# Altium PCB shower.PcbDoc
Units mil, origin at the board's own origin, x right, y up, seen from the top; angles counter-clockwise.
Board outline 1185 x 2235 mil, 2 copper layers (Top Layer, Bottom Layer); 123 components, 63 nets, 249 pads, 31 vias.
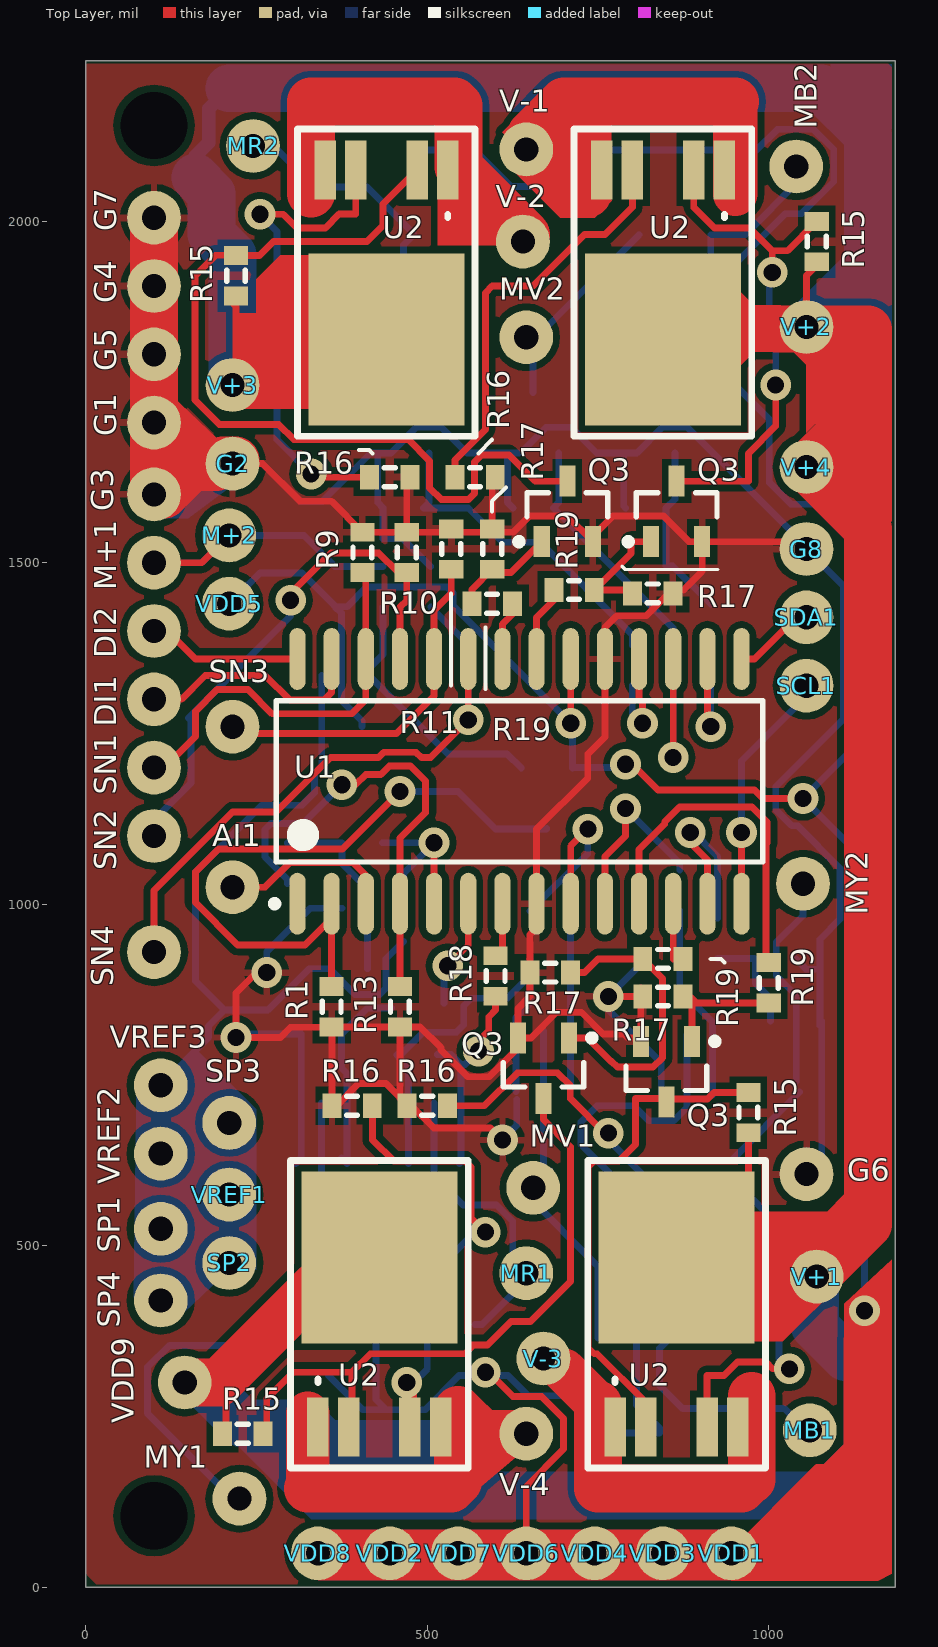
[diagram p0: Top Layer view]
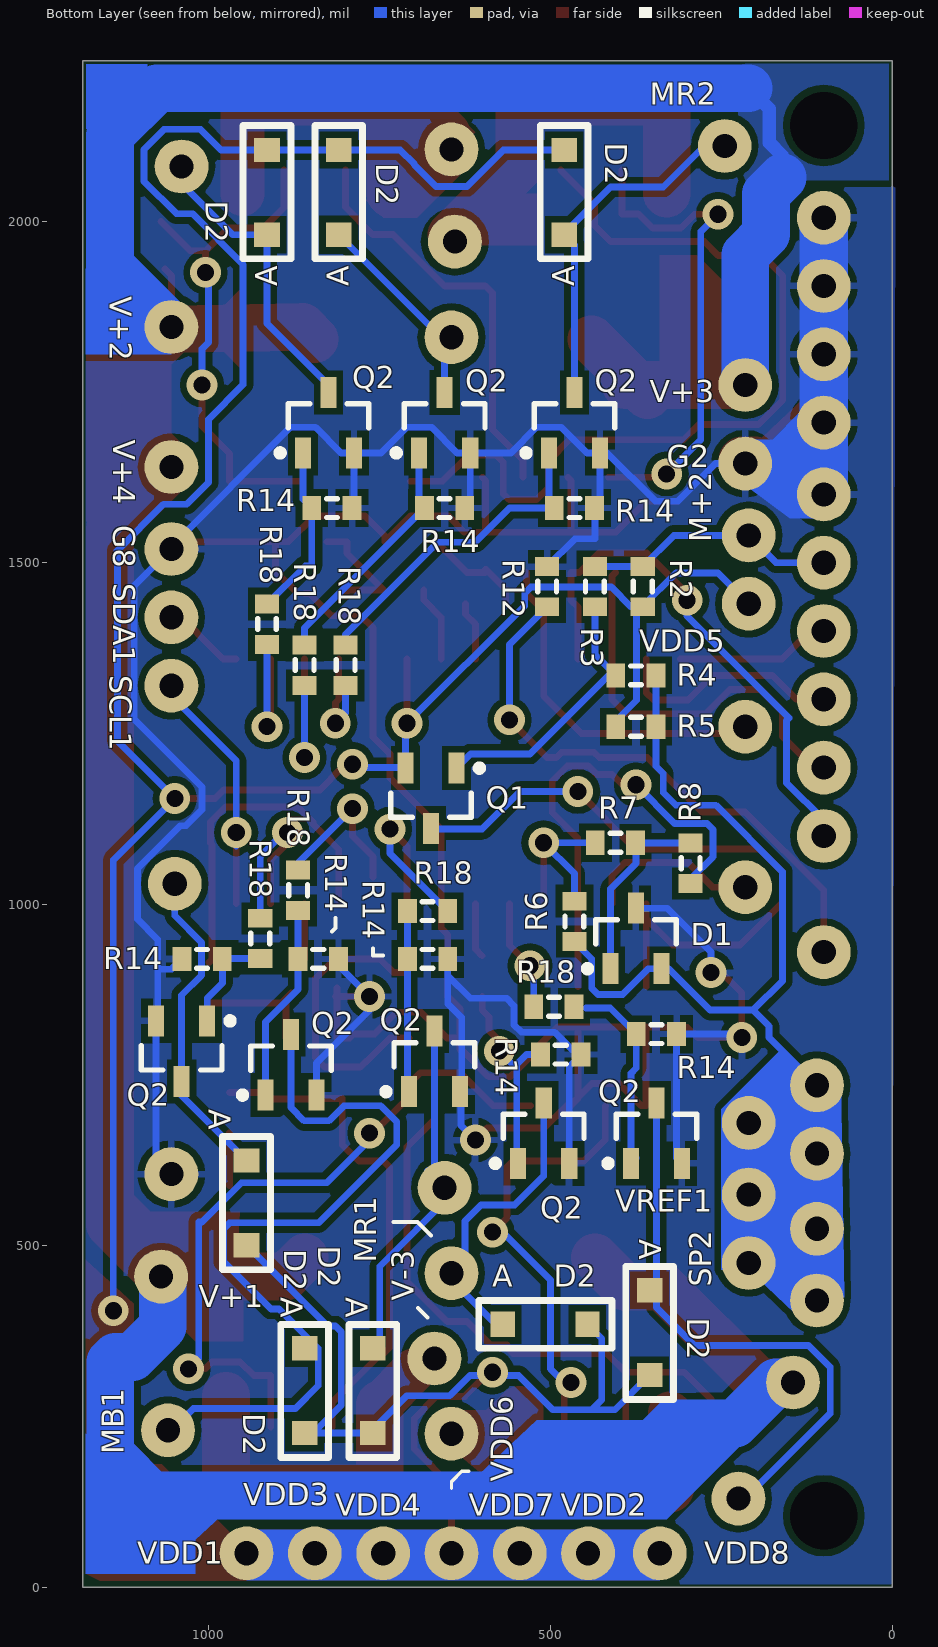
[diagram p1: Bottom Layer view, seen from below]

## Layer stack, top to bottom
Top Layer: signal copper 1.4
Dielectric: dielectric 12.6, FR-4, Dk 4.8
Bottom Layer: signal copper 1.4

## Board outline
0,0 0,2235 1185,2235 1185,0

## Design rules (kind name [scope] priority, off if disabled: settings)
Clearance [All] p1: gap=10
MinimumSolderMaskSliver [All] p1: minsoldermaskwidth=9.5
PolygonConnect [All] p1: connectstyle=Relief reliefconductorwidth=10 reliefentries=4 polygonreliefangle="90 Angle" airgapwidth=10
RoutingVias [All] p1: holewidth=28 width=50 viastyle="Through Hole" minholewidth=28 minwidth=45 maxholewidth=28 maxwidth=55
SMDNeckDown SMDNeckDownMC [InNetClass('mc')] p1: percent=250.000
SMDNeckDown SMDNeckDownHC [InNetClass('hc')] p2: percent=250.000
SilkToSilkClearance [All] p1: silktosilkclearance=6.5
SilkToSolderMaskClearance SilkToSolderMaskClearance_R0603 [HasFootprint('J1-0603')] p1: minsilkscreentomaskgap=0 clearancetoexposedcopper=TRUE
SilkToSolderMaskClearance [IsPad] p2: minsilkscreentomaskgap=10 clearancetoexposedcopper=TRUE
SolderMaskExpansion [All] p1: expansion=4
Width WidthHC [InNetClass('hc')] p1: maxlimit=10000 minlimit=10 preferedwidth=70
Width [All] p2: maxlimit=1000 minlimit=10 preferedwidth=10
Width WidthMc [InNetClass('mc')] p3: maxlimit=500 minlimit=10 preferedwidth=30
25 further rules are at their usual default settings.

## Classes and differential pairs
channel class vdriver: U9 U10 U11 U12
channel class mdriver: U1 U2 U3 U4 U5 U6 U7 U8
net class mc: NetD2_U1_1 NetD2_U2_1 NetD2_U3_1 NetD2_U4_1 NetD2_U5_1 NetD2_U6_1 NetD2_U7_1 NetD2_U8_1 VCC VOVER
net class hc: NetR15_U9_1 NetU2_U9_1 NetU2_U10_1 NetU2_U11_1 NetU2_U12_1
component class U12: Q3 R15 R16 R17 R19 U2
component class U11: Q3 R15 R16 R17 R19 U2
component class U10: Q3 R15 R16 R17 R19 U2
component class U9: Q3 R15 R16 R17 R19 U2
component class U8: D2 Q2 R14 R18
component class U7: D2 Q2 R14 R18
component class U6: D2 Q2 R14 R18
component class U5: D2 Q2 R14 R18
component class U4: D2 Q2 R14 R18
component class U3: D2 Q2 R14 R18
component class U2: D2 Q2 R14 R18
component class U1: D2 Q2 R14 R18
component class shower: AI1 D1 DI1 DI2 G1 G2 G3 G4 G5 G6 G7 G8 M+1 M+2 MB1 MB2 MR1 MR2 MV1 MV2 MY1 MY2 Q1 R1 R2 R3 R4 R5 R6 R7 R8 R9 R10 R11 R12 R13 SCL1 SDA1 SN1 SN2 SN3 SN4 SP1 SP2 SP3 SP4 V+1 V+2 V+3 V+4 V-1 V-2 V-3 V-4 VDD1 VDD2 VDD3 VDD4 VDD5 VDD6 VDD7 VDD8 VDD9 VREF1 VREF2 VREF3

## Components (designator, comment, footprint, x,y, rotation, side; value= is the part's Value field where it differs from the comment)
AI1 "+5V" PIN1 215,1025 r0 top
D1 "TLV431B" SOT-23_N 375,950 r90 bottom
D2 "1N4148W" SOD-123 915,1980 r90 bottom
D2 "1N4148W" SOD-123 810,1980 r90 bottom
D2 "1N4148W" SOD-123 480,1980 r90 bottom
D2 "1N4148W" SOD-123 945,625 r270 bottom
D2 "1N4148W" SOD-123 860,350 r270 bottom
D2 "1N4148W" SOD-123 760,350 r270 bottom
D2 "1N4148W" SOD-123 570,385 r180 bottom
D2 "1N4148W" SOD-123 355,435 r270 bottom
DI1 "+5V" PIN1 100,1300 r0 top
DI2 "+5V" PIN1 100,1400 r0 top
G1 "Socket" PIN1 100,1705 r0 top
G2 "Socket" PIN1 215,1645 r0 top
G3 "Socket" PIN1 100,1600 r0 top
G4 "Socket" PIN1 100,1905 r0 top
G5 "Socket" PIN1 100,1805 r0 top
G6 "Socket" PIN1 1055,605 r0 top
G7 "Socket" PIN1 100,2005 r0 top
G8 "Socket" PIN1 1055,1520 r0 top
M+1 "+5V" PIN1 100,1500 r0 top
M+2 "+5V" PIN1 210,1540 r0 top
MB1 "B" PIN1 1060,230 r0 top
MB2 "B" PIN1 1040,2080 r0 top
MR1 "R" PIN1 645,460 r0 top
MR2 "R" PIN1 245,2110 r0 top
MV1 "V" PIN1 655,585 r0 top
MV2 "V" PIN1 645,1830 r0 top
MY1 "Y" PIN1 225,130 r0 top
MY2 "Y" PIN1 1050,1030 r0 top
Q1 "BC857B" SOT-23_N 675,1155 r270 bottom
Q2 "BC847B" SOT-23_N 825,1705 r90 bottom
Q2 "BC847B" SOT-23_N 655,1705 r90 bottom
Q2 "BC847B" SOT-23_N 465,1705 r90 bottom
Q2 "BC847B" SOT-23_N 1040,785 r270 bottom
Q2 "BC847B" SOT-23_N 880,765 r90 bottom
Q2 "BC847B" SOT-23_N 670,770 r90 bottom
Q2 "BC847B" SOT-23_N 510,665 r90 bottom
Q2 "BC847B" SOT-23_N 345,665 r90 bottom
Q3 "BC847B" SOT-23_N 670,760 r270 top
Q3 "BC847B" SOT-23_N 850,755 r270 top
Q3 "BC847B" SOT-23_N 705,1575 r90 top
Q3 "BC847B" SOT-23_N 865,1575 r90 top
R1 "10k" J1-0603 360,850 r90 top
R2 "1R" J1-0603 365,1465 r270 bottom
R3 "3.3k" J1-0603 435,1465 r90 bottom
R4 "16.7k 0.1%" J1-0603 375,1335 r0 bottom
R5 "1k 0.1%" J1-0603 375,1260 r0 bottom
R6 "2.87k 0.1%" J1-0603 465,975 r270 bottom
R7 "1.8k 0.1%" J1-0603 405,1090 r0 bottom
R8 "698 0.1%" J1-0603 295,1060 r90 bottom
R9 "10k" J1-0603 405,1515 r270 top
R10 "10k" J1-0603 470,1515 r270 top
R11 "10k" J1-0603 535,1520 r270 top
R12 "10k" J1-0603 505,1465 r270 bottom
R13 "4.02k 0.1%" J1-0603 460,850 r90 top
R14 "10k" J1-0603 820,1580 r180 bottom
R14 "10k" J1-0603 655,1580 r180 bottom
R14 "10k" J1-0603 465,1580 r180 bottom
R14 "10k" J1-0603 1010,920 r0 bottom
R14 "10k" J1-0603 840,920 r180 bottom
R14 "10k" J1-0603 680,920 r180 bottom
R14 "10k" J1-0603 485,780 r180 bottom
R14 "10k" J1-0603 345,810 r180 bottom
R15 "22k" J1-0603 230,225 r0 top
R15 "22k" J1-0603 970,695 r90 top
R15 "22k" J1-0603 220,1920 r90 top
R15 "22k" J1-0603 1070,1970 r90 top
R16 "1.2k" J1-0603 390,705 r180 top
R16 "1.2k" J1-0603 500,705 r180 top
R16 "1.2k" J1-0603 445,1625 r0 top
R16 "1.2k" J1-0603 570,1625 r0 top
R17 "10k" J1-0603 680,900 r180 top
R17 "10k" J1-0603 845,865 r180 top
R17 "10k" J1-0603 595,1520 r90 top
R17 "10k" J1-0603 830,1455 r0 top
R18 "1.2k" J1-0603 915,1410 r90 bottom
R18 "1.2k" J1-0603 860,1350 r90 bottom
R18 "1.2k" J1-0603 800,1350 r90 bottom
R18 "1.2k" J1-0603 925,950 r270 bottom
R18 "1.2k" J1-0603 869.53,1020.47 r270 bottom
R18 "1.2k" J1-0603 680,990 r0 bottom
R18 "1.2k" J1-0603 600,895 r270 top
R18 "1.2k" J1-0603 495,850 r180 bottom
R19 "1.2k" J1-0603 845,920 r180 top
R19 "1.2k" J1-0603 1000,885 r270 top
R19 "1.2k" J1-0603 595,1440 r180 top
R19 "1.2k" J1-0603 715,1460 r0 top
SCL1 "+5V" PIN1 1055,1320 r90 top
SDA1 "+5V" PIN1 1055,1420 r90 top
SN1 "+5V" PIN1 100,1200 r0 top
SN2 "+5V" PIN1 100,1100 r0 top
SN3 "+5V" PIN1 215,1260 r0 top
SN4 "+5V" PIN1 100,930 r0 top
SP1 "+5V" PIN1 110,525 r0 top
SP2 "+5V" PIN1 210,475 r0 top
SP3 "+5V" PIN1 210,680 r0 top
SP4 "+5V" PIN1 110,420 r0 top
U1 "PIC16F1938/SO" SOIC-SO28_N 635,1180 r90 top
U2 "BTS6143D" BTS6143D 340,235 r0 top
U2 "BTS6143D" BTS6143D 775,235 r0 top
U2 "BTS6143D" BTS6143D 530,2075 r180 top
U2 "BTS6143D" BTS6143D 935,2075 r180 top
V+1 "+5V" PIN1 1070,455 r0 top
V+2 "+5V" PIN1 1055,1845 r0 top
V+3 "+5V" PIN1 215,1760 r0 top
V+4 "+5V" PIN1 1055,1640 r0 top
V-1 "+5V" PIN1 645,2105 r0 top
V-2 "+5V" PIN1 640,1970 r0 top
V-3 "+5V" PIN1 670,335 r0 top
V-4 "+5V" PIN1 645,225 r0 top
VDD1 "+5V" PIN1 945,50 r90 top
VDD2 "+5V" PIN1 445,50 r90 top
VDD3 "+5V" PIN1 845,50 r90 top
VDD4 "+5V" PIN1 745,50 r90 top
VDD5 "+5V" PIN1 210,1440 r90 top
VDD6 "+5V" PIN1 645,50 r90 top
VDD7 "+5V" PIN1 545,50 r90 top
VDD8 "+5V" PIN1 340,50 r90 top
VDD9 "+5V" PIN1 145,300 r90 top
VREF1 "+5V" PIN1 210,575 r90 top
VREF2 "+5V" PIN1 110,635 r90 top
VREF3 "+5V" PIN1 110,735 r90 top

## Footprints (in the part's own frame and the unit in brackets; to place one, negate y for a bottom-side part, rotate by r counter-clockwise, add the part's x,y. Pads: shape width x height; smd on the part's side, far side on the other; paste and mask are expansions set on the pad)
BTS6143D [mm]
  rect 0.8x2.2 smd mask+0.03: 1(0,0) 2(1.14,0) 4(3.42,0) 5(4.56,0)
  rect 5.8x6.4 smd: 3(2.28,6.3)
  silkscreen extent -1.02,-1.52 5.59,9.91
J1-0603 [mm] "Chip Resistor, Body 1.6x0.8mm, IPC High Density"
  rect 0.7x0.9 smd: 1(-0.75,0) 2(0.75,0)
  silkscreen extent -0.2,-0.35 0.2,0.35, body extent -0.85,-0.48 0.85,0.48, height 0.9
PIN1 [mm] "Connector; Plug"
  round 2 hole 0.9: 1(0,0)
SOD-123 [mm]
  rect 0.9x0.95 smd: 1(0,0) 2(3.15,0)
  silkscreen extent -0.89,-0.89 4.06,0.89
SOIC-SO28_N [mm] "SOIC, 28-Leads, Body 17.9x7.5mm, Pitch 1.27mm, IPC Medium Density"
  oval 2.3x0.6 smd: 1(-4.55,8.255) 2(-4.55,6.985) 3(-4.55,5.715) 4(-4.55,4.445) 5(-4.55,3.175) 6(-4.55,1.905) 7(-4.55,0.635) 8(-4.55,-0.635) 9(-4.55,-1.905) 10(-4.55,-3.175) 11(-4.55,-4.445) 12(-4.55,-5.715) 13(-4.55,-6.985) 14(-4.55,-8.255) 15(4.55,-8.255) 16(4.55,-6.985) 17(4.55,-5.715) 18(4.55,-4.445) 19(4.55,-3.175) 20(4.55,-1.905) 21(4.55,-0.635) 22(4.55,0.635) 23(4.55,1.905) 24(4.55,3.175) 25(4.55,4.445) 26(4.55,5.715) 27(4.55,6.985) 28(4.55,8.255)
  silkscreen extent -4.67,-9.05 3,9.23, body extent -3.8,-9.06 3.8,9.06, height 2.65
SOT-23_N [mm] "SOT23, 3-Leads, Body 2.9x1.3mm, Pitch 0.95mm, Lead Span 2.5mm, IPC Medium Density"
  rect 1.15x0.6 smd: 1(-1.125,0.95) 2(-1.125,-0.95) 3(1.125,0)
  silkscreen extent -1.25,-1.5 0.7,1.93, body extent -0.7,-1.5 0.7,1.5, height 1.1

## Part data
AI1 DI1 DI2 M+1 M+2 MB1 MB2 MR1 MR2 MV1 MV2 MY1 MY2 SCL1 SDA1 SN1 SN2 SN3 SN4 SP1 SP2 SP3 SP4 V+1 V+2 V+3 V+4 V-1 V-2 V-3 V-4 VDD1 VDD2 VDD3 VDD4 VDD5 VDD6 VDD7 VDD8 VDD9 VREF1 VREF2 VREF3: library part Socket, "Socket"
D1: library part TLV431A
D2 D2 D2 D2 D2 D2 D2 D2: library part Diode, "Default Diode"
Q1: library part PNP, "PNP Bipolar Transistor"
Q2 Q2 Q2 Q2 Q2 Q2 Q2 Q2 Q3 Q3 Q3 Q3: library part NPN, "NPN Bipolar Transistor"
R1 R2 R3 R4 R5 R6 R7 R8 R9 R10 R11 R12 R13 R14 R14 R14 R14 R14 R14 R14 R14 R15 R15 R15 R15 R16 R16 R16 R16 R17 R17 R17 R17 R18 R18 R18 R18 R18 R18 R18 R18 R19 R19 R19 R19: library part Res3, "Resistor"
U1: library part PIC16F1936T-I/SO, "CMOS Microcontroller with LCD Driver, 8K (words) Program Memory, 256 Bytes Data Memory, 512 Bytes SRAM, 25 I/O's, 28-Pin SOIC, Industrial Temperature, Tape and Reel"

## Free pads (board coordinates)
  round 0 hole 98.43: ""(100,105) ""(100,2140)

## Via types
v1: diameter 45, hole 25, Top Layer to Bottom Layer, 31 vias

## Nets (pads, with @x,y where several pads share a name; then routed paths per layer and width w, separated by ;. In a path a pad name is that pad's centre, name@x,y a point inside that pad or via, vN(x,y) a via of type N, cw(c..) or ccw(c..) an arc to the next point about the centre after c; other vN are vias at no path point)
GND: D1.3 G1.1 G2.1 G3.1 G4.1 G5.1 G6.1 G7.1 G8.1 Q2.2 Q3.2 R1.1 R9.1 R10.1 R11.1 R12.1 R13.1 R14.2 R16.2 R17.2 U1.8 U1.19 | length 8433.9
  Top Layer w10: G2.1 258.43,1645 313.43,1590 359.53,1590 R9.1 R10.1 ; v1@265,910 v1(265,900) 250,900 220,870 v1(220,805) 285,805 300,820 R1.1@360.47,820 ; R16.2@360,705 R16.2@360.47,705 ; R16.2@474.53,1625 470,1620.47 R10.1 ; R16.2@599.53,1625 595,1620.47 R17.2@595,1544.53 ; v1(610,655) 592.72,672.28 509.53,672.28 476.82,705 R16.2@470.47,705 ; v1@765,860 v1(765,865) R17.2@815,865 ; R17.2@812.6,877.87 812.6,804.29 793.99,804.29 788.28,810 757.35,810 725.43,841.93 689.38,841.93 651.74,804.29 Q3.2@632.6,804.29 ; R17.2@859.53,1455 853.18,1455 820.47,1422.28 777.28,1422.28 760,1405 U1.19 760,1245 735,1220 735,1185 660,1110 U1.8 660,965 650.47,955.47 650.47,900 650.47,865.47 632.6,847.6 Q3.2@632.6,804.29 ; 875,1460 902.4,1487.4 Q3.2@902.4,1530.71 ; G8.1 1044.29,1530.71 Q3.2@902.4,1530.71 ; R16.2@360.47,705 366.82,705 399.53,737.72 439.52,737.72 R16.2@460,717.24 ; R16.2@360.47,705 R1.1@360.47,820 ; R1.1@360.47,820 R1.1 R13.1 ; R16.2@460,717.24 470.47,706.76 R16.2@470.47,705 ; R16.2@460,717.24 460,715.47 R16.2@470.47,705 ; R16.2@460,717.24 R13.1 ; R13.1 489.53,820.47 520,790 520,786.97 559.47,747.5 590.53,747.5 630.63,787.6 632.6,787.6 Q3.2@632.6,804.29 ; R10.1 R17.2@595,1544.53 ; R17.2@595,1544.53 625.76,1544.53 649.57,1568.35 704.76,1568.35 742.4,1530.71 742.4,1539.09 771.65,1568.35 845.62,1568.35 883.26,1530.71 Q3.2@902.4,1530.71
  Top Layer w70: G7.1 G4.1 G5.1 G1.1 G3.1 115,1600 155,1640 190.68,1640 200.68,1650 G2.1@219.32,1650
  Bottom Layer w10: G7.1@100,1980 G5.1 G1.1 G3.1 145,1645 G2.1 258.43,1645 313.43,1590 346.57,1590 417.28,1660.71 Q2.2@427.6,1660.71 ; v1(220,805) 225,810 315.47,810 315.47,628.58 Q2.2@307.6,620.71 ; v1(265,900) 265,930 329.29,994.29 D1.3 ; Q2.2@472.6,620.71 472.6,762.4 455.24,779.76 461.58,779.76 494.53,812.72 542.72,812.72 553.31,823.31 553.31,851.34 564.47,862.5 617.5,862.5 650.47,895.47 ; R12.1 464.53,1535 435,1535 435,1579.53 435.47,1580 427.6,1587.87 Q2.2@427.6,1660.71 ; v1(610,655) 630.94,675.94 Q2.2@630.94,714.06 ; R14.2@625.47,1580 617.6,1587.87 Q2.2@617.6,1660.71 ; Q2.2@630,725.71 630,834.47 650.47,854.94 650.47,895.47 ; R14.2@650.47,920 650.47,895.47 ; R14.2@790.47,1580 787.6,1582.87 Q2.2@787.6,1660.71 ; R14.2@810.47,920 810.47,910.47 v1(765,865) 765,845.47 842.6,767.87 Q2.2@842.6,720.71 ; R14.2@1039.53,920 1054.53,905 1075,905 ; G6.1@1047.4,607.6 G6.1@1050,605 ; Q2.2@1075,822.17 1075,905 ; G6.1@1077.4,607.6 Q2.2@1077.4,829.29 ; Q2.2@427.6,1660.71 446.74,1660.71 484.38,1698.35 520.43,1698.35 558.06,1660.71 Q2.2@617.6,1660.71 ; Q2.2@617.6,1660.71 636.74,1660.71 674.38,1698.35 710.43,1698.35 748.06,1660.71 Q2.2@787.6,1660.71 ; Q2.2@787.6,1660.71 806.74,1660.71 844.38,1698.35 880.43,1698.35 1055,1523.77 G8.1 1109.37,1465.63 1109.37,1270.94 1010,1171.57 1010,1138.43 1033.43,1115 1041.89,1115 1104.37,1052.52 1104.37,978.11 1075,948.74 1075,905
NetAI1_1: AI1.1 U1.3 | length 269.2
  Top Layer w10: AI1.1@205,1025 262.75,1025 298.89,1061.14 391.14,1061.14 410,1042.28 U1.3
NetD1_1: D1.1 R7.1 R8.2 | length 279.3
  Bottom Layer w10: R8.2 375,1089.53 375,1065 375,1060 412.4,1022.6 D1.1
NetD1_2: D1.2 R4.1 R5.1 R6.2 SP1.1 SP2.1 SP3.1 SP4.1 VREF1.1 VREF2.1 VREF3.1 | length 1783.2
  Bottom Layer w10: SP4.1 155,420 SP2.1 VREF1.1 SP3.1 165,635 VREF2.1 ; SP1.1 VREF2.1 ; R4.1 R5.1 345.47,1202.04 335,1191.57 335,1163.28 316.72,1145 258.11,1145 160.63,1047.52 160.63,887.8 203.43,845 ; R6.2 439.79,920.26 439.79,877.43 430.43,868.07 394.38,868.07 356.74,905.71 D1.2 327.28,905.71 266.57,845 203.43,845 ; VREF2.1 VREF3.1 180,805 180,821.57 203.43,845
NetD2_U1_1: D2.1@355,435 MY1.1 Q2.3@345,709.29 | length 833.9
  Bottom Layer w10: MY1.1@215,130 90.63,254.37 90.63,322.52 122.48,354.37 289.37,354.37 345,410 Q2.3@345,709.29
NetD2_U2_1: D2.1@570,385 MR1.1 Q2.3@510,709.29 | length 445.9
  Bottom Layer w10: Q2.3@510,709.29 510,602.45 552.45,560 601.57,560 625,536.57 625,480 MR1.1 645,450 580,385 D2.1@570,385
NetD2_U3_1: D2.1@760,350 MV1.1 Q2.3@670,814.29 | length 507.3
  Bottom Layer w10: MV1.1@670,610 Q2.3@670,814.29 ; MV1.1@680,610 645,575 750,470 D2.1@750,365
NetD2_U4_1: D2.1@860,350 MB1.1 Q2.3@880,809.29 | length 1162.5
  Bottom Layer w10: Q2.3@880,809.29 880,702.45 860.62,683.07 824.57,683.07 802.65,705 748.43,705 725,681.57 725,648.43 839.73,533.7 969.91,533.7 978.7,524.91 978.7,477.05 909.35,407.7 897.7,407.7 840,350 840,295.48 873.43,262.05 1022.95,262.05 MB1.1@1055,230
NetD2_U5_1: D2.1@945,625 MY2.1 Q2.3@1040,740.71 | length 459.1
  Bottom Layer w10: D2.1@945,625 Q2.3@1045,725 ; Q2.3@1040,740.71 1040,866.82 1010.75,896.07 1010.75,943.93 1050,983.18 MY2.1
NetD2_U6_1: D2.1@480,1980 MR2.1 Q2.3@465,1749.29 | length 526.9
  Bottom Layer w10: MR2.1 275,2110 335,2050 411.92,2050 480,1981.92 480,1980 465,1965 Q2.3@465,1749.29
NetD2_U7_1: D2.1@810,1980 MV2.1 Q2.3@655,1749.29 | length 312
  Bottom Layer w10: Q2.3@655,1749.29 655,1820 MV2.1 660,1830 D2.1@810,1980
NetD2_U8_1: D2.1@915,1980 MB2.1 Q2.3@825,1749.29 | length 431.1
  Bottom Layer w10: Q2.3@825,1749.29 825,1760 915,1850 915,1980 965,1980 MB2.1@1045,2060
NetDI1_1: DI1.1 U1.27 | length 343.2
  Top Layer w10: DI1.1 140,1300 175,1335 262.75,1335 298.89,1298.86 348.86,1298.86 360,1310 U1.27
NetDI2_1: DI2.1 U1.28 | length 226.9
  Top Layer w10: DI2.1 120,1400 160.87,1359.13 U1.28
NetQ1_1: Q1.1 R3.1 R4.2 | length 402.4
  Bottom Layer w10: R3.1 435,1365.47 R4.2 415,1335 530,1220 616.89,1220 Q1.1
NetQ2_U1_1: Q2.1@382.4,620.71 R14.1@374.53,810 R18.2@465.47,850 | length 293
  Bottom Layer w10: Q2.1@374.53,628.58 382.4,620.71 382.4,752.6 374.53,760.47 374.53,810 412.6,848.07 448.07,848.07
NetQ2_U2_1: Q2.1@547.4,620.71 R14.1@514.53,780 R18.2@600,865.47 | length 311.1
  Top Layer w10: v1(575,785) 575,800 590,815 590,835 600,845 R18.2@600,865.47
  Bottom Layer w10: R14.1@514.53,780 535,780 549.53,765.47 ; Q2.1@547.4,620.71 549.53,622.83 549.53,765.47 ; v1(575,785) 555.47,765.47 549.53,765.47
NetQ2_U3_1: Q2.1@707.4,725.71 R14.1@709.53,920 R18.2@709.53,990 | length 256.4
  Bottom Layer w10: Q2.1@709.53,733.58 709.53,920 R18.2@709.53,990
NetQ2_U4_1: Q2.1@917.4,720.71 R14.1@869.53,920 R18.2@869.53,990.94 | length 290.1
  Bottom Layer w10: R18.2@869.53,990.94 869.53,920 869.53,875.47 917.4,827.6 Q2.1@917.4,720.71
NetQ2_U5_1: Q2.1@1002.6,829.29 R14.1@980.47,920 R18.2@925,920.47 | length 155
  Bottom Layer w10: R18.2@925,920.47 979.06,920.47 980,919.53 980,885 1002.6,862.4 Q2.1@1002.6,829.29
NetQ2_U6_1: Q2.1@502.4,1660.71 R14.1@494.53,1580 R18.2@800,1379.53 | length 481.5
  Bottom Layer w10: Q2.1@502.4,1660.71 502.4,1587.87 494.53,1580 560,1580 610,1530 665,1530 800,1395 R18.2@800,1379.53
NetQ2_U7_1: Q2.1@692.4,1660.71 R14.1@684.53,1580 R18.2@860,1379.53 | length 357.1
  Bottom Layer w10: Q2.1@692.4,1660.71 692.4,1587.87 684.53,1580 860,1404.53 R18.2@860,1379.53
NetQ2_U8_1: Q2.1@862.4,1660.71 R14.1@849.53,1580 R18.2@915,1439.53 | length 259.2
  Bottom Layer w10: Q2.1@862.4,1660.71 862.4,1592.87 849.53,1580 849.53,1495.47 859.06,1495.47 R18.2@915,1439.53
NetQ3_U9_1: Q3.1@827.6,1530.71 R17.1@800.47,1455 R19.2@744.53,1460 | length 180.4
  Top Layer w10: R17.1@800.47,1455 795.47,1460 744.53,1460 798.06,1513.54 798.06,1530.71 Q3.1@827.6,1530.71
NetQ3_U9_3: Q3.3@865,1619.29 R15.2@1070,1999.53 U2.2@890.12,2075 | length 741.6
  Top Layer w10: Q3.3@865,1619.29 970,1619.29 970,1660 1010,1700 v1(1010,1760) ; U2.2@890.12,2075 890.12,2020.12 920.24,1990 971.58,1990 1005,1956.58 ; v1(1005,1925) 1005,1956.58 ; R15.2@1070,1999.53 1027.05,1956.58 1005,1956.58
  Bottom Layer w10: v1@1000.63,1925 1000.63,1822.48 1010,1813.11 v1(1010,1760)
NetQ3_U10_1: Q3.1@667.6,1530.71 R17.1@595,1490.47 R19.2@565.47,1440 | length 154
  Top Layer w10: R19.2@565.47,1440 565.47,1460.95 R17.1@595,1490.47 ; R17.1@595,1485.47 622.36,1485.47 Q3.1@667.6,1530.71
NetQ3_U10_3: Q3.3@705,1619.29 R15.2@220,1949.53 U2.2@485.12,2075 | length 1288.9
  Top Layer w10: U2.2@485.12,2075 435.35,2025.24 435.35,1993.43 411.92,1970 275,1970 254.53,1949.53 220,1949.53 219.53,1950 190,1950 160,1920 160,1738.11 195.6,1702.51 282.49,1702.51 305,1680 472.24,1680 503.31,1648.93 503.31,1609.46 520.48,1592.28 560.47,1592.28 569.25,1601.07 569.25,1647.43 579.53,1657.72 619.52,1657.72 657.95,1619.29 Q3.3@705,1619.29
NetQ3_U11_1: Q3.1@887.4,799.29 R17.1@874.53,865 R19.2@1000,855.47 | length 184.3
  Top Layer w10: R17.1@879.53,870 R17.1@887.4,862.13 ; Q3.1@887.4,804.29 R17.1@887.4,862.13 ; R19.2@1000,855.47 894.06,855.47 R17.1@887.4,862.13
NetQ3_U11_3: Q3.3@850,710.71 R15.2@970,724.53 U2.2@819.88,235 | length 737.1
  Top Layer w10: U2.2@819.88,235 819.88,270.39 748.22,342.05 744.38,342.05 735.59,350.83 735.59,615.23 744.38,624.02 780.58,624.02 805,648.43 805,715.71 850,715.71 850.71,715 910,715 919.53,724.53 R15.2@970,724.53
NetQ3_U12_1: Q3.1@707.4,804.29 R17.1@709.53,900 R19.2@815.47,920 | length 428.7
  Top Layer w10: Q3.1@707.4,804.29 734.78,804.29 769.07,770 770,770 778.35,761.65 830.62,761.65 844.25,775.28 844.25,891.22 R19.2@815.47,920 ; R17.1@709.53,900 730,900 750,920 R19.2@813.18,920
NetQ3_U12_3: Q3.3@670,715.71 R15.2@259.53,225 U2.2@384.88,235 | length 933.9
  Top Layer w10: R15.2@264.53,225 265,225.47 265,275.71 304.29,315 390,315 ; U2.2@389.88,235 390,235.12 390,315 ; Q3.3@670,715.71 670,685 710,645 ; 709.89,645 709.89,448 651.26,389.37 622.48,389.37 588.11,355 563.94,355 563.94,350.83 555.15,342.05 417.05,342.05 390,315
NetR10_2: R10.2 SN2.1 U1.25 | length 777.9
  Top Layer w10: v1@300,1455 359.25,1514.25 428.93,1514.25 457.71,1485.47 R10.2 470,1445 460,1435 U1.25
  Bottom Layer w10: SN2.1 100,1123.11 154.37,1177.48 154.37,1268.78 150.63,1272.52 300,1421.89 v1@300,1455
  other v1: 300,1445
NetR11_2: R11.2 SN3.1 U1.24 | length 518.6
  Top Layer w10: SN3.1@205,1250 455,1250 510,1305 U1.24 510,1430 535,1455 R11.2@535,1485.47
NetR12_2: R12.2 SN4.1 U1.23 | length 937.2
  Top Layer w10: SN4.1 100,1020 215,1135 278.43,1135 358.43,1215 428.68,1215 436.18,1222.5 483.82,1222.5 491.32,1215 505,1215 v1(560,1270) U1.23
  Bottom Layer w10: R12.2 560,1380.47 v1(560,1270)
NetR15_U9_1: R15.1 U2.3 V+1.1 V+2.1 V+3.1 V+4.1 VDD9.1 | length 6181.4
  Top Layer w10: R15.1@205.47,225 205.47,289.53 ; R15.1@210,1885 220,1875 V+3.1@220,1760 ; U2.3@970,588.27 R15.1@970,665.47 ; V+2.1 1055,1920.47 R15.1@1064.53,1930
  Top Layer w70: VDD9.1 195,300 335.05,440.05 391.79,440.05 U2.3@434.76,483.03 ; V+3.1@220,1760 U2.3@390,1760 ; U2.3@358.27,1745 U2.3@440.24,1826.97 ; U2.3@845.24,1826.97 863.27,1845 1054.95,1841.77 1145,1841.77 1145,1730 V+4.1 1055,1639.32 1145,1549.32 1145,531.26 1068.74,455 887.8,455 U2.3@859.76,483.03
  Bottom Layer w19.68: 160.63,2063.69 160.63,2095.63 180,2115 180,2164.32 210.05,2194.37
  Bottom Layer w70: VDD9.1 170,300 230,240 285.93,240 391.56,134.37 1074.95,134.37 1079.32,130 1144.37,195.05 1144.37,330 1136.87,337.5 1112.04,337.5 1067.5,382.04 V+1.1@1067.5,442.5 ; 160.63,2063.69 184.37,2039.95 184.37,1981.26 215,1950.63 V+3.1 ; 210.05,2194.37 1076.34,2194.37 1145,2125.71 1145,1935 V+2.1
NetR16_U9_1: R16.1@540.47,1625 U2.4@800.35,2075 | length 610.4
  Top Layer w10: R16.1@540.47,1625 540.47,1650.47 585,1695 585,1895 595,1905 655,1905 730.35,1980.35 760.35,1980.35 800.35,2020.35 U2.4@800.35,2075
NetR16_U10_1: R16.1@415.47,1625 U2.4@395.35,2075 | length 718.3
  Top Layer w10: v1(255,2010) 289.29,2010 309.29,1990 350.71,1990 371.06,2010.35 395.35,2010.35 U2.4@395.35,2075 ; v1@330,1625 R16.1@415.47,1625
  Bottom Layer w10: v1(255,2010) 280,1985 280,1680 v1(330,1630)
NetR16_U11_1: R16.1@529.53,705 U2.4@909.65,235 | length 1040.5
  Top Layer w10: R16.1@529.53,705 583.39,705 631.73,753.35 690.81,753.35 709.35,734.8 709.35,715.65 v1@762.5,662.5 ; U2.4@909.65,235 909.65,310 934.29,310 954.29,330 995.71,330 1005.71,320 v1(1030,320)
  Bottom Layer w10: v1(765,665) 765,655 827.72,592.28 952.72,592.28 1010,535 1015,535 1015,335 v1(1030,320)
NetR16_U12_1: R16.1@419.53,705 U2.4@474.65,235 | length 652
  Top Layer w10: R16.1@419.53,705 420,704.53 420,655 450.98,624.02 555.15,624.02 563.94,615.23 563.94,541.06 v1(585,520) ; U2.4@479.65,235 480,235.35 v1@480,300
  Bottom Layer w10: v1@480,300 500,320 500,450 570,520 v1(585,520)
  other v1: 470,300
NetR18_U1_1: R18.1@524.53,850 U1.6 | length 160.6
  Top Layer w10: v1(530,910) 560,940 U1.6
  Bottom Layer w10: R18.1@524.53,855 524.53,904.53 v1(530,910)
NetR18_U2_1: R18.1@600,924.53 U1.7 | length 80.5
  Top Layer w10: R18.1@600,924.53 610,934.53 U1.7
NetR18_U3_1: R18.1@650.47,990 U1.9 | length 274.5
  Top Layer w10: U1.9 710,1085 v1(735,1110)
  Bottom Layer w10: R18.1@650.47,990 735,1074.53 v1(735,1110)
NetR18_U4_1: R18.1@869.53,1050 U1.10 | length 235.4
  Top Layer w10: U1.10@760,1040 760,1070 790,1100 v1(790,1140)
  Bottom Layer w10: v1(790,1140) 869.53,1060.47 R18.1@869.53,1050
NetR18_U5_1: R18.1@925,979.53 U1.13 | length 266.5
  Top Layer w10: v1(885,1105) 885,1090 910,1065 U1.13
  Bottom Layer w10: v1(885,1105) 885,1110 925,1070 R18.1@925,979.53
NetR18_U6_1: R18.1@800,1320.47 U1.18 | length 157.9
  Top Layer w10: U1.18 810,1300 815,1295 v1(815,1265)
  Bottom Layer w10: R18.1@800,1320.47 800,1280 v1(815,1265)
NetR18_U7_1: R18.1@860,1320.47 U1.17 | length 254.1
  Top Layer w10: v1(860,1215) U1.17
  Bottom Layer w10: v1(860,1215) R18.1@860,1325
NetR18_U8_1: R18.1@915,1380.47 U1.16 | length 221.7
  Top Layer w10: U1.16 910,1265 v1(915,1260)
  Bottom Layer w10: v1(915,1260) R18.1@915,1380.47
NetR19_U9_1: R19.1@685.47,1460 U1.21 | length 111.4
  Top Layer w10: U1.21 660,1420 685.47,1445.47 R19.1@685.47,1460
NetR19_U10_1: R19.1@624.53,1440 U1.22 | length 86.9
  Top Layer w10: U1.22 610,1410 624.53,1424.53 R19.1@624.53,1440
NetR19_U11_1: R19.1@1000,914.53 U1.11 | length 512
  Top Layer w10: U1.11 810,1080 847.5,1117.5 847.5,1120.53 869.47,1142.5 975.53,1142.5 997.5,1120.53 997.5,1089.47 995.63,1087.6 995.63,918.9 R19.1@1000,914.53
NetR19_U12_1: R19.1@874.53,920 U1.12 | length 80.9
  Top Layer w10: 860,920 U1.12
NetSCL1_1: SCL1.1 U1.14 | length 393.5
  Top Layer w10: U1.14 v1(960,1105)
  Bottom Layer w10: v1@960,1085 960,1210 1055,1305 SCL1.1@1055,1335
NetSDA1_1: SDA1.1 U1.15 | length 126.4
  Top Layer w10: U1.15 979.13,1359.13 SDA1.1@1055,1435
NetU2_U9_1: U2.1@935,2075 U2.5@755.47,2075 V-1.1 | length 550
  Top Layer w65: 950.87,2040 950.87,2175
  Top Layer w70: V-1.1@652.5,2127.5 700,2175 950.87,2175 ; 734.61,2040 734.61,2136.95
NetU2_U10_1: U2.1@530,2075 U2.5@350.47,2075 V-2.1 | length 583.5
  Top Layer w70: 330,2040 330,2175 540,2175 545.87,2169.13 545.87,2079.13 V-2.1@645,1980
NetU2_U11_1: U2.1@775,235 U2.5@954.53,235 V-3.1 | length 532.7
  Top Layer w65: V-3.1@700,317.6 750,267.6
  Top Layer w70: 750,267.6 750,145 960,145 965,150 ; 975,157.72 975,280
NetU2_U12_1: U2.1@340,235 U2.5@519.53,235 V-4.1 | length 543.6
  Top Layer w64: 325,145 U2.1@325,255
  Top Layer w70: 325,145 535,145 545,155 545,260 580,225 V-4.1@635,225
V110: R8.1 R13.2 U1.4 | length 692
  Top Layer w10: v1(375,1175) 395,1175 410,1190 431.97,1190 444.47,1202.5 475.53,1202.5 497.5,1180.53 497.5,1134.07 460.28,1096.84 460.28,1001.14 U1.4 R13.2
  Bottom Layer w10: R8.1 295,1036.82 262.28,1069.53 262.28,1109.52 271.07,1118.31 318.31,1118.31 v1(375,1175)
V170: R6.1 R7.2 U1.5 | length 268.7
  Top Layer w10: U1.5 v1(510,1090)
  Bottom Layer w10: R7.2 v1(510,1090) 465,1045 R6.1
VCC: D2.2 Q1.2 R2.2 R5.2 U1.20 VDD1.1 VDD2.1 VDD3.1 VDD4.1 VDD5.1 VDD6.1 VDD7.1 VDD8.1 | length 6416.1
  Top Layer w10: v1@595,310 625,280 625,279.37 667.52,279.37 699.37,247.52 699.37,202.48 645,148.11 VDD6.1@645,60 ; v1(710,1265) U1.20 ; v1@805,1200 837.5,1167.5 978.82,1167.5 991.32,1155 v1(1050,1155) ; VDD1.1 1070.63,175.63 1082.52,175.63 1114.37,207.48 1114.37,364.37 1140,390 v1(1140,405)
  Bottom Layer w10: VDD5.1 255,1485 316.57,1485 365,1436.57 R2.2 ; VDD8.1 VDD2.1 VDD7.1 VDD6.1 VDD4.1 ; D2.2@355,310.98 405.98,260 440.29,260 ; R5.2 404.53,1268.04 373.78,1298.78 374.25,1299.25 374.25,1426.22 R2.2 ; D2.2@445.98,385 425,364.02 425,275.29 440.29,260 ; D2.2@480,2104.02 569.09,2104.02 622.48,2050.63 667.52,2050.63 699.37,2082.48 699.37,2083.39 720,2104.02 810,2104.02 915,2104.02 982.12,2104.02 1012.48,2134.37 1065.63,2134.37 1095,2105 1095,2058.11 1047.75,2010.86 1024.14,2010.86 950,1936.72 950,1760.58 1000.63,1709.95 1000.63,1617.48 1032.48,1585.63 1066.26,1585.63 1134.53,1517.36 ; VDD4.1@750,55 VDD4.1 ; v1@805,1200 713.11,1200 Q1.2 712.4,1262.6 v1(710,1265) 537.72,1437.28 537.72,1455.47 528.93,1464.25 411.07,1464.25 382.29,1435.47 R2.2 ; VDD1.1 VDD3.1 VDD4.1 ; D2.2@945,500.98 826.73,382.72 815.09,382.72 806.3,373.93 806.3,267.19 840,233.49 840,225.98 765,225.98 710.35,280.63 647.48,280.63 618.11,310 546.57,310 496.57,260 440.29,260 ; 1134.05,1516.89 1134.05,1239.05 v1(1050,1155) 1140,1065 v1@1140,420
  other v1: 585,315 790,1205
VOVER: M+1.1 M+2.1 R2.1 R3.2 | length 497
  Top Layer w10: M+1.1 170,1500 M+2.1
  Bottom Layer w10: M+1.1 170,1500 M+2.1 319.53,1540 R2.1 R3.2
VSENS: R9.2 SN1.1 U1.26 | length 596.2
  Top Layer w10: SN1.1@100,1185 160.63,1245.63 160.63,1282.52 192.48,1314.37 237.52,1314.37 273.03,1278.86 388.86,1278.86 410,1300 U1.26 410,1480.47 R9.2
VSTOP: Q1.3 R1.2 U1.2 | length 993.6
  Top Layer w10: R1.2 U1.2@360,979.49 ; U1.2 U1.2@360,979.49 ; v1(460,1165) 376.14,1081.14 194.25,1081.14 160.63,1047.52 160.63,1002.48 222.52,940.59 321.11,940.59 U1.2@360,979.49
  Bottom Layer w10: v1(460,1165) 545,1165 600,1110 674.29,1110 Q1.3
pads on no net: U1.1

## Polygon pours and split planes (outlines as drawn)
GND on Bottom Layer "Top Layer-No Net" (solid, pour order 5): -5,2230 1180,2230 1180,10.02 1174.91,5 0.26,5
NetR15_U9_1 on Bottom Layer "Top Layer-No Net" (solid, pour order 8): 5,2060 224.8,2060 224.8,2059.93 224.8,2220.2 ccw(c215,2220.2) 215,2230 5,2230
GND on Top Layer "Top Layer-No Net" (solid, pour order 7): 0,2230 1174.96,2230 1180,2225 1180,5 15.25,5 0,20

## Other copper
Top Layer:
  rectangle net VCC: 340,10 945,85
  rectangle net NetR15_U9_1: 1100,1560 1180,1745
  region net NetR15_U9_1: 1080,545 1115,580 1130,580 1130,540
  region net VCC: 945,10 1160,10 1180,20 1180,480 1110,415 1110,380 1114.37,207.48 1082.52,175.63 1070.63,175.63 970,75
  region net GND: 190,1670 205,1670 125,1745 122.5,1737.5 115,1730 85,1730 85,1650 100,1635
  region net NetU2_U12_1: 540,115 635,195 625,195 585,235 550,200
  region net NetR15_U9_1: 950,360 1020,360 1110,450 1095,465 950,465
  region net NetR15_U9_1: 955,550 1135,550 1050,465 1050,460 965,460 960,455
  region net NetU2_U10_1: 600,1965 515,1965 515,2040 555,2040 575,2060 630,2005 630,2000
  region net NetU2_U9_1: 770,2030 745,2005 695,2005 615,2085 615,2125 610,2130 655,2175 700,2175
  region net NetR15_U9_1: 1025,1820 1055,1790 1055,1690 1080,1715 1135,1715 1135,1820 1145,1830
  region net NetR15_U9_1: 980,1875 950,1905 950,1880 940,1870
  region net NetR15_U9_1: 950,1780 980,1810 975,1810 950,1835
  region net NetR15_U9_1: 285,1950 250,1915 250,1865 225,1865 220,1860 220,1780 340,1780 340,1950
Bottom Layer:
  rectangle net VCC: 340,10 945,85
  rectangle net NetR15_U9_1: 1090,2135 1180,2230
  region net NetR15_U9_1: 1020,105 955,130 1020,70 1020,20 1180,20 1180,225
  region net NetR15_U9_1: 605,165 520,245 365,245 335,275 270,275 245,250 215,215 330,100 605,100
  region net GND: 65,2010 65,1595 95,1565 150,1565 210,1610 210,1680 175,1680 135,1720 135,2010
  region net NetD1_2: 130,760 160,790 250,700 250,465 210,465 130,390 70,425 75,750
  region net NetR15_U9_1: 1055,1805 1180,1805 1180,1930

## Silkscreen, mask and mechanical layers (free items; w line width, h text height)
Top Overlay:
  lines w5: 785,1495 790,1490 925.62,1490
  lines w6: 400,1665 415,1665 420,1660 ; 535,1320 535,1455 ; 575,1660 595,1680 ; 585,1315 585,1405 ; 595,1575 595,1590 615,1610 ; 915,920 930,920 935,915
Bottom Overlay:
  lines w5: 620,170 630,170 645,155 645,145
  lines w6: 675,515 695,535 730,535 ; 680,395 694,409 ; 745,925 760,925 760,935 ; 815,980 815,965 820,960
Mechanical 1:
  the board outline again, w47.24

## Text inside footprints (layer, text, board x,y; h text height)
D2: Bottom Overlay "A" at 900,1905 h32 r270
D2: Bottom Overlay "A" at 795,1905 h32 r270
D2: Bottom Overlay "A" at 465,1905 h32 r270
D2: Bottom Overlay "A" at 1000,700 h32 r90
D2: Bottom Overlay "A" at 895,425 h32 r90
D2: Bottom Overlay "A" at 800,425 h32 r90
D2: Bottom Overlay "A" at 585,440 h32
D2: Bottom Overlay "A" at 370,510 h32 r90